# Altium PCB MSXII_DC-DC_Converter.PcbDoc
Units mm, origin at the board's own origin, x right, y up, seen from the top; angles counter-clockwise.
Board outline 120 x 80 mm, 2 copper layers (Top Layer, Bottom Layer); 22 components, 22 nets, 77 pads, 6 vias.
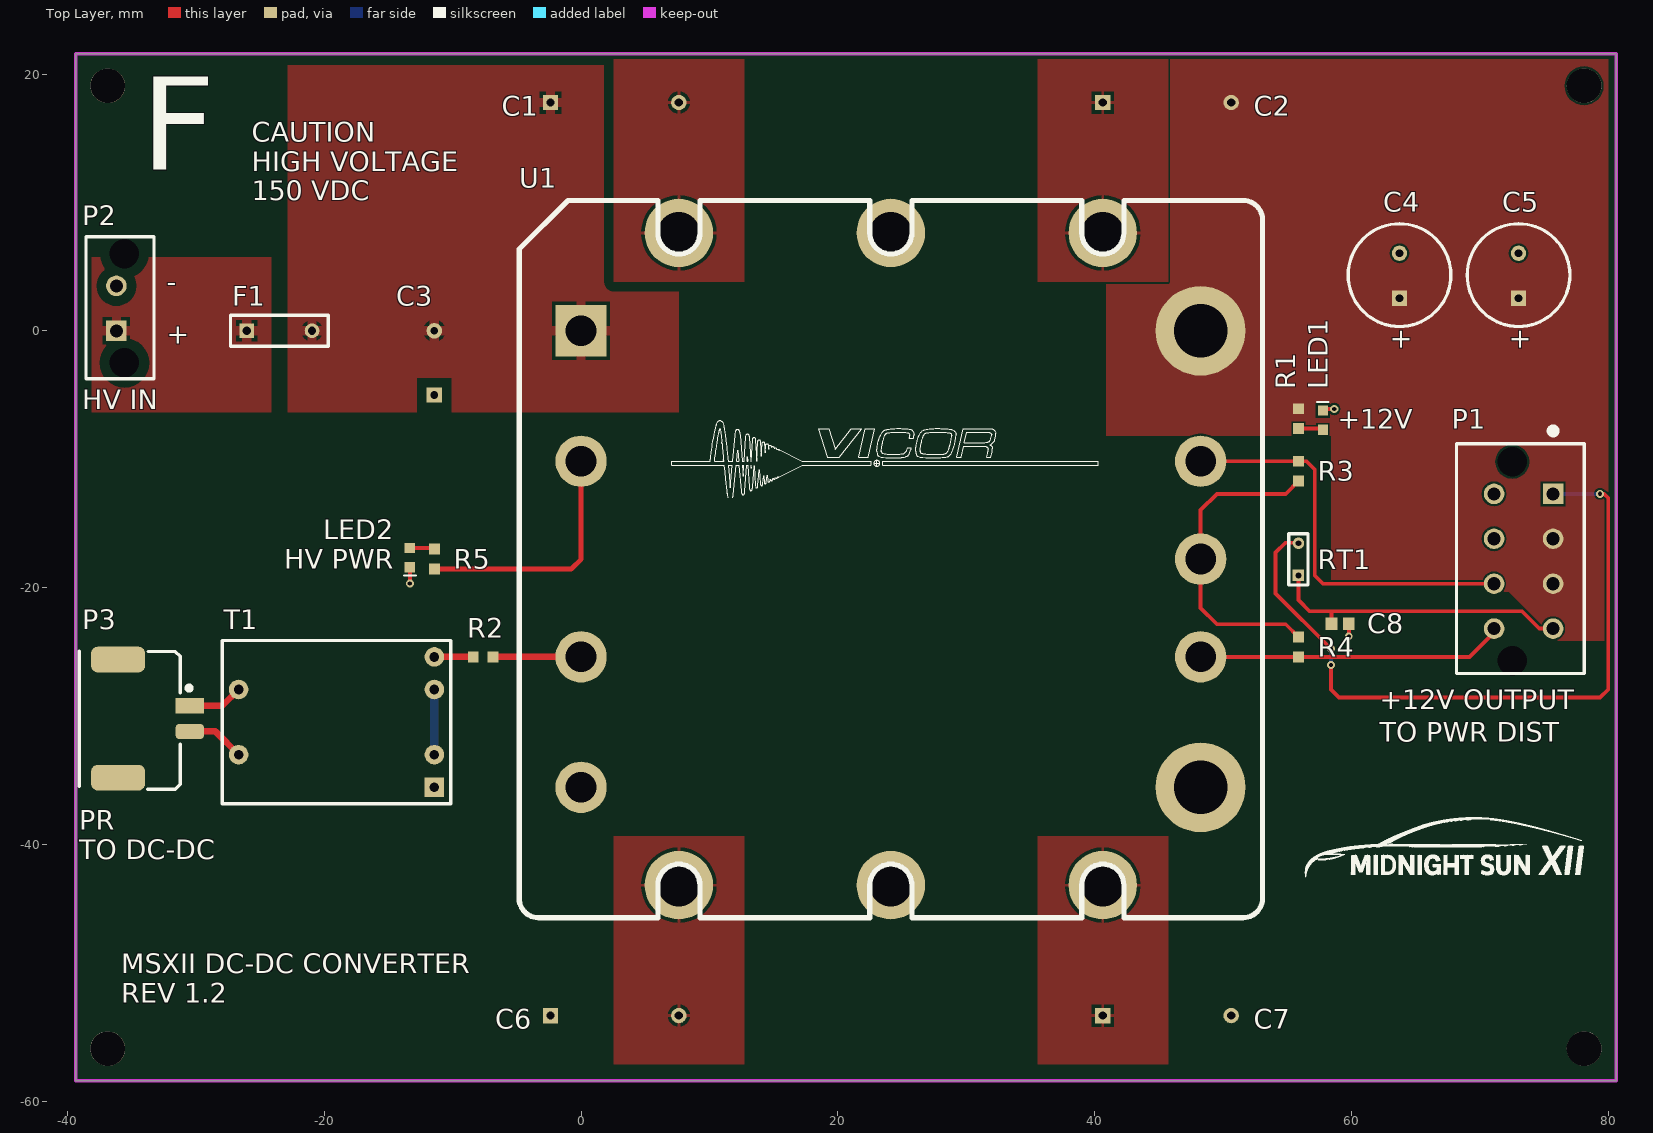
[diagram p0: Top Layer view]
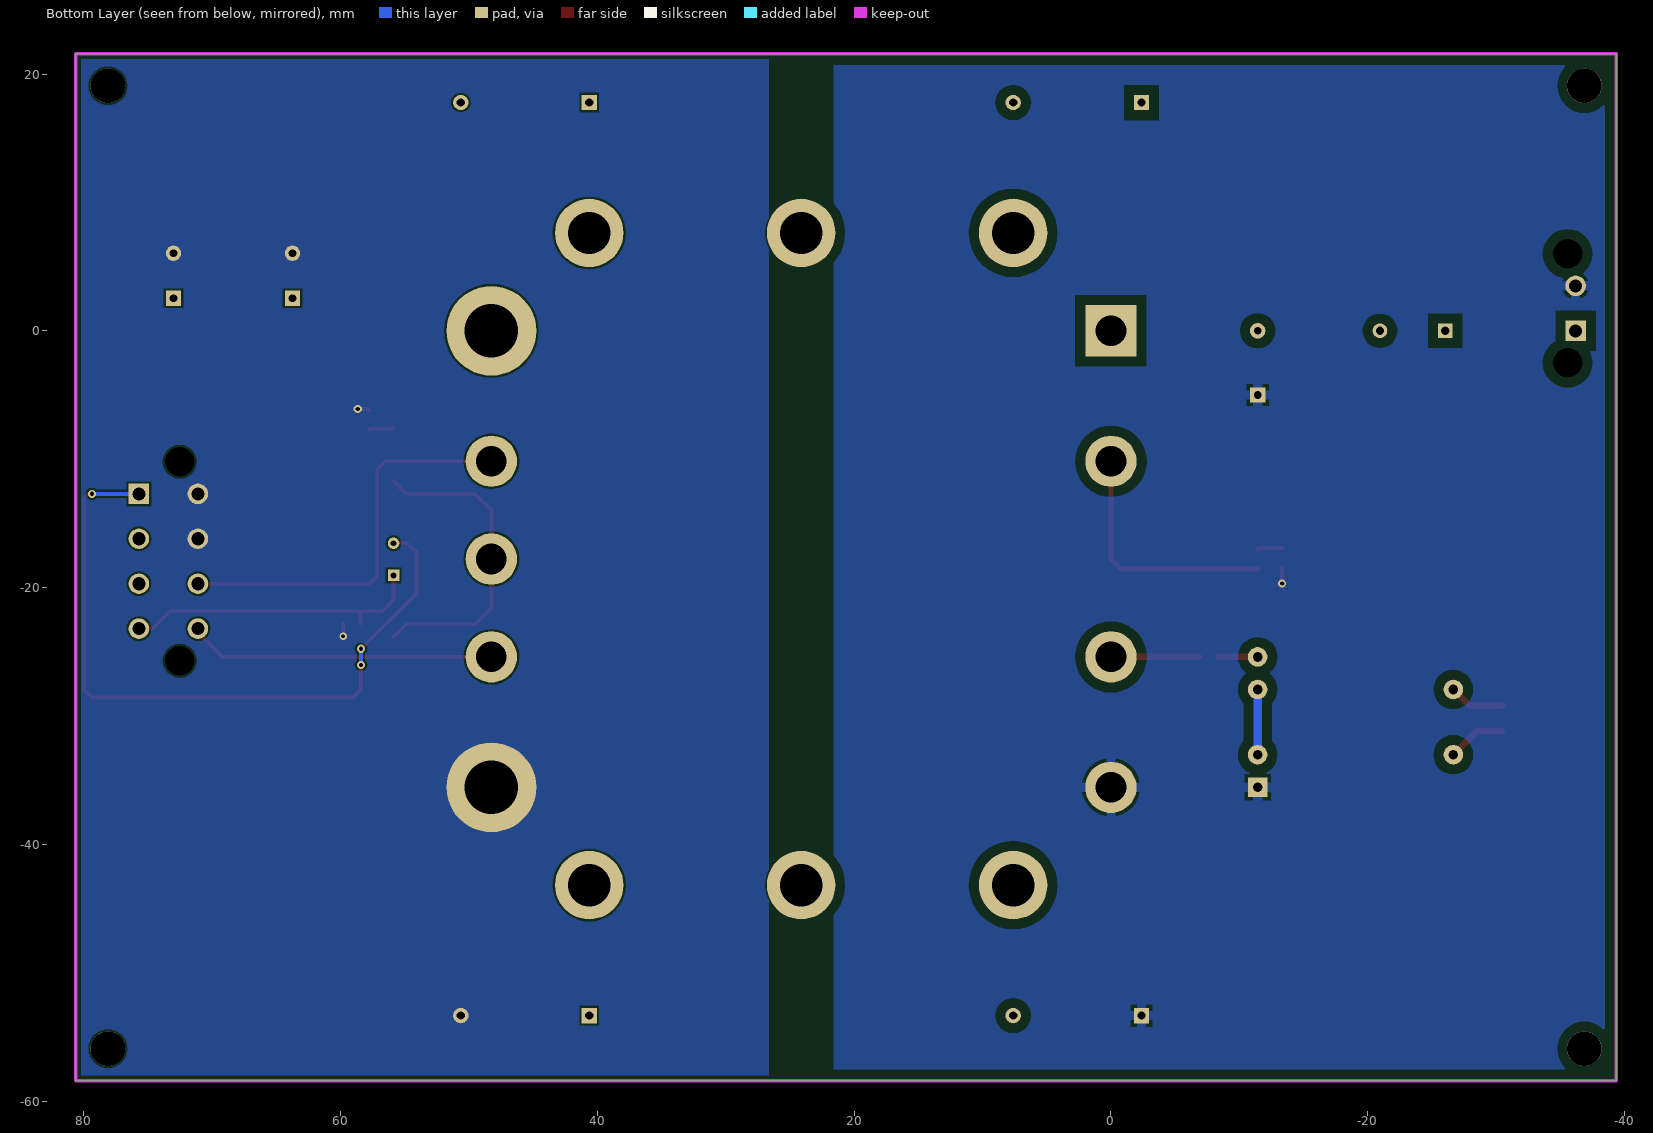
[diagram p1: Bottom Layer view, seen from below]
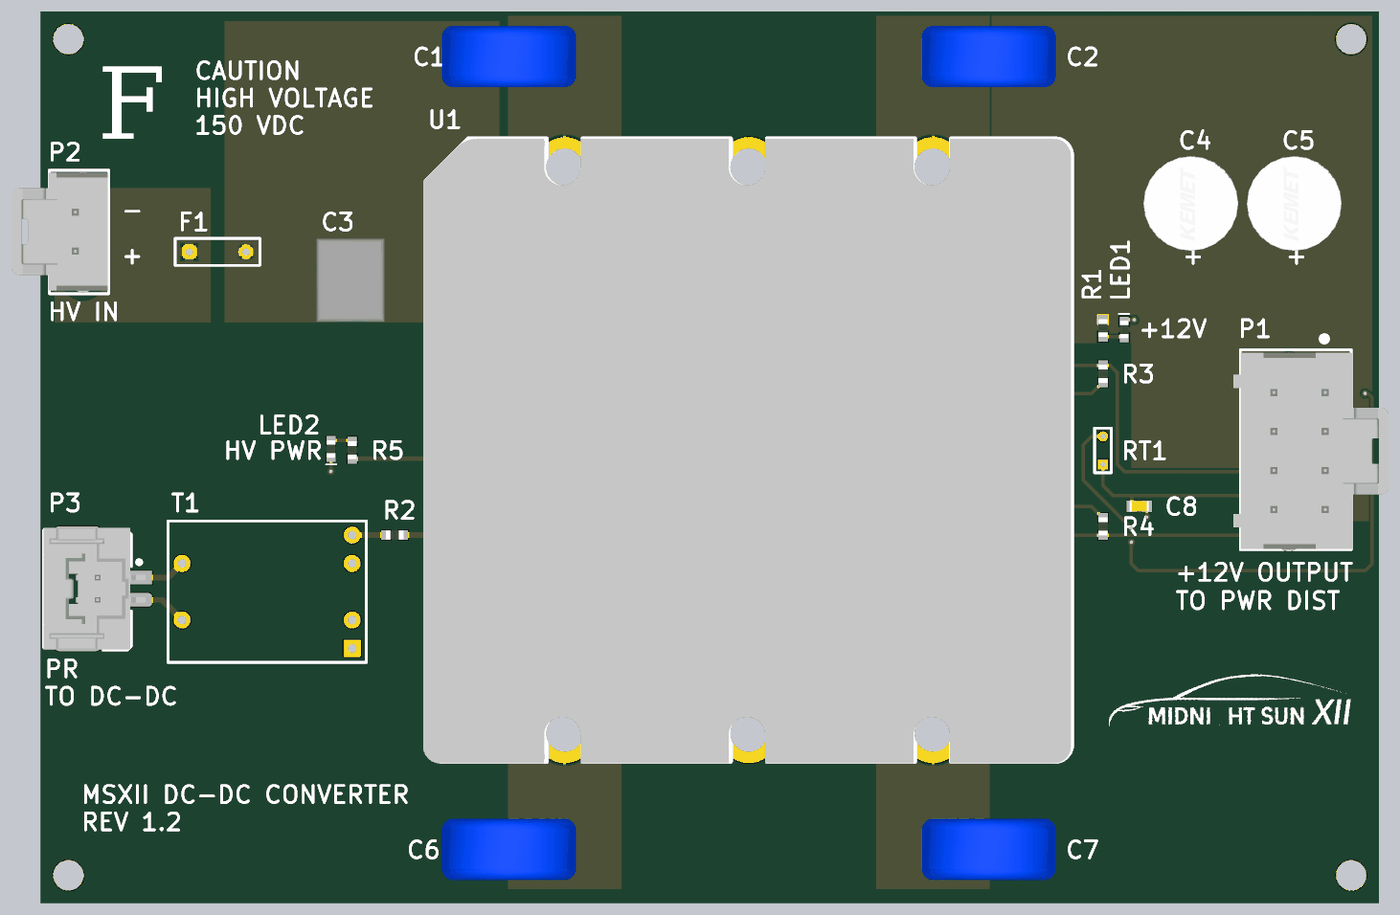
[diagram p2: 3D render of the assembled board from above, using the file's embedded part models]

## Layer stack, top to bottom
Top Solder: solder mask 0.0102, Solder Resist, Dk 3.5
Top Layer: signal copper 0.0356
Dielectric 1: dielectric 0.32, FR-4, Dk 4.8
Bottom Layer: signal copper 0.0356
Bottom Solder: solder mask 0.0102, Solder Resist, Dk 3.5

## Board outline
-39.37,-58.42 80.63,-58.42 80.63,21.58 -39.37,21.58

## Design rules (kind name [scope] priority, off if disabled: settings)
BoardOutlineClearance [All] p1: gap=0.406 ignorepadtopadclearanceinfootprint=FALSE
Clearance "HV Clearance" [InNetClass('HV')] p1: gap=0.762 ignorepadtopadclearanceinfootprint=TRUE
Clearance [All] p2: gap=0.152 ignorepadtopadclearanceinfootprint=FALSE except(0: Arc-Hole Track-Hole SMDPad-Hole THPad-Hole Via-Hole Fill-Hole Poly-Hole Region-Hole Text-Hole)
ComponentClearance ComponentClearance_ControllerBoard [InComponent('P1') vs Identifier = 'Controller-Board'] p1: gap=0 collisioncheckmode=3 verticalgap=0 showdistances=FALSE
ComponentClearance ComponentClearance_Standoffs [Identifier = 'Standoff' vs Identifier = 'Controller-Board'] p2: gap=0 collisioncheckmode=3 verticalgap=0 showdistances=FALSE
ComponentClearance [All] p3: gap=0.254 collisioncheckmode=3 verticalgap=0.254 showdistances=FALSE
DiffPairsRouting [All] p1: maxlimit=0.254 minlimit=0.254 mostfreqgap=0.254 toplayer_minwidth=0.381 toplayer_maxwidth=0.381 toplayer_prefwidth=0.381 bottomlayer_minwidth=0.381 bottomlayer_maxwidth=0.381 bottomlayer_prefwidth=0.381 maxuncoupledlength=12.7
HoleSize [All] p1: absolutevalues=TRUE maxlimit=6.3 minlimit=0.3 maxpercent=80.000 minpercent=20.000
MinimumAnnularRing [All] p1: minimumring=0.152
MinimumSolderMaskSliver [All] p1: minsoldermaskwidth=0.3
PolygonConnect PolygonConnect_5A [InNetClass('5A')] p1: connectstyle=Relief reliefconductorwidth=0.762 reliefentries=4 polygonreliefangle="90 Angle" airgapwidth=0.254
PolygonConnect PolygonConnect_HighCurrent [InNetClass('20A')] p2: connectstyle=Direct reliefconductorwidth=0.254 reliefentries=4 polygonreliefangle="90 Angle" airgapwidth=0.254
PolygonConnect [IsPad] p3: connectstyle=Relief reliefconductorwidth=0.254 reliefentries=4 polygonreliefangle="90 Angle" airgapwidth=0.254
PolygonConnect PolygonConnect_NoThermal [Not(IsPad)] p4: connectstyle=Direct reliefconductorwidth=0.254 reliefentries=4 polygonreliefangle="90 Angle" airgapwidth=0.254
RoutingVias [All] p1: holewidth=0.3 width=0.6 viastyle="Through Hole" minholewidth=0.3 minwidth=0.6 maxholewidth=0.711 maxwidth=1.27
SilkToSolderMaskClearance [IsPad] p1: minsilkscreentomaskgap=0.178 clearancetoexposedcopper=TRUE
SolderMaskExpansion [All] p1: expansion=0.102
Width [All] p1: maxlimit=2.54 minlimit=0.152 preferedwidth=0.381
25 further rules are at their usual default settings.

## Classes and differential pairs
net class 5A: HV_GND NetC1_1 NetF1_1
net class HV: HV_GND NetC1_1 NetF1_1 NetR2_2 NetR5_1
net class 20A: GND NetC2_2
differential pair PR_1: +PR_1_P -PR_1_N

## Components (designator, comment, footprint, x,y, rotation, side; value= is the part's Value field where it differs from the comment)
C1 "CAP CER 4700PF 400VAC Y5V RADIAL" "CAP 4700PF 400VAC Y5V RADIAL" -2.38,17.78 r0 top value=4700pF
C2 "CAP CER 4700PF 400VAC Y5V RADIAL" "CAP 4700PF 400VAC Y5V RADIAL" 40.64,17.78 r0 top value=4700pF
C3 "CAP FILM 0.22UF 5% 250VDC RADIAL" "CAP FILM 0.22UF 5% 250VDC RADIAL" -11.43,-5 r90 top value=0.22uF
C4 "CAP ALUM 100UF 20% 50V RADIAL" "CAP ALUM 100UF 50V" 63.754,2.54 r90 top
C5 "CAP ALUM 100UF 20% 50V RADIAL" "CAP ALUM 100UF 50V" 73.025,2.54 r90 top
C6 "CAP CER 4700PF 400VAC Y5V RADIAL" "CAP 4700PF 400VAC Y5V RADIAL" -2.38,-53.34 r0 top value=4700pF
C7 "CAP CER 4700PF 400VAC Y5V RADIAL" "CAP 4700PF 400VAC Y5V RADIAL" 40.64,-53.34 r0 top value=4700pF
C8 "CAP CER 0.1UF 50V 10% X7R 0603" "CAP, 0603" 59.13,-22.82 r0 top
F1 "5A 400VDC" "FUSE 5A 400VDC RADIAL" -26.035,0 r0 top
LED1 "LED GREEN CLEAR 2V 0603" LED_0603 57.795,-7.652 r90 top
LED2 "LED RED CLEAR 2V 0603" LED_0603 -13.345,-16.973 r270 top
P1 "CONN 8POS ULTRA-FIT 0.138\"" "CONN, 8POS ULTRA-FIT" 75.72,-12.7 r270 top
P2 "CONN 2POS ULTRA-FIT 0.138\"" "CONN, 2POS ULTRA-FIT" -36.195,0 r90 top
P3 "Dura-Clik" "CONN, 2POS Dura-Click Vertical" -30.48,-29.21 r270 top
R1 "RES 4.7K OHM 1% 1/10W 0603" "RES, 0603" 55.88,-6.845 r270 top
R2 "RES 75R OHM 1% 1/10W 0603" "RES, 0603" -7.62,-25.4 r0 top value=75R
R3 "RES 1M OHM 1% 1/10W 0603" "RES, 0603" 55.88,-10.935 r270 top
R4 "RES 1M OHM 1% 1/10W 0603" "RES, 0603" 55.88,-24.625 r270 top
R5 "RES 4.7K OHM 1% 1/10W 0603" "RES, 0603" -11.43,-17.78 r90 top
RT1 "10K NTC" "NTC THERMISTOR BEAD" 55.88,-19.05 r90 top
T1 "PR BUS" "XFMR PR BUS" -11.43,-35.56 r180 top
U1 "12V 250W (No BOM)" "DCDC VICOR 150V-12V 250W" 0,0 r0 top

## Footprints (in the part's own frame and the unit in brackets; to place one, negate y for a bottom-side part, rotate by r counter-clockwise, add the part's x,y. Pads: shape width x height; smd on the part's side, far side on the other; paste and mask are expansions set on the pad)
"CAP 4700PF 400VAC Y5V RADIAL" [mm] "4700pF ±20% 400VAC Ceramic Capacitor Y5V (F) Radial, Disc"
  rect 1.2x1.2 hole 0.65: 1(0,0)
  round 1.2 hole 0.65: 2(10,0)
  body extent -1,-3 11,2.5, height 16
"CAP ALUM 100UF 50V" [mm] "CAP ALUM 100UF 20% 50V RADIAL"
  rect 1.2x1.2 hole 0.6: 1(0,0)
  round 1.2 hole 0.6: 2(3.5,0)
  silkscreen extent -2.2,-4 5.8,4, body extent -2.45,-4.25 6.05,4.25, height 12.5
"CAP FILM 0.22UF 5% 250VDC RADIAL" [mm]
  rect 1.2x1.2 hole 0.6: 1(0,0)
  round 1.2 hole 0.6: 2(5,0)
  body extent -1.3,-2.9 6.2,3.21, height 11.3
"CAP, 0603" [mm] "Chip Capacitor, 2-Leads, Body 1.60x0.81mm, IPC Medium Density"
  rect 0.9x1 smd mask+0.076: 1(-0.675,0) 2(0.675,0)
  body extent -0.87,-0.48 0.87,0.48, height 0.9
"CONN, 2POS Dura-Click Vertical" [mm] "WM7169CT-ND"
  rect 1.2x2.2 smd: 1(0,0)
  rrect50% 1.2x2.2 smd: 2(2,0)
  rrect50% 2x4.2 smd: 3(-3.6,-5.58) 3(5.6,-5.58)
  silkscreen extent -4.28,-8.6 6.5,0.05, body extent -4.45,-8.63 6.45,0.52, height 8
"CONN, 2POS ULTRA-FIT" [mm] "2 Positions Header, Shrouded Connector 0.138\" (3.50mm) Through Hole Gold"
  rect 1.6x1.6 hole 1.02: 1(0,0)
  round 1.6 hole 1.02: 2(3.5,0)
  round 1.6 hole 2.3: ""(-2.5,-0.63) ""(6,-0.63)
  silkscreen extent -3.74,-2.93 7.33,2.37, body extent -3.48,-2.87 7.12,5.79, height 13.85
"CONN, 8POS ULTRA-FIT" [mm]
  rect 1.6x1.6 hole 1.02: 1(0,0)
  round 1.6 hole 1.02: 2(3.5,0) 3(7,0) 4(10.5,0) 5(0,-4.6) 6(3.5,-4.6) 7(7,-4.6) 8(10.5,-4.6)
  round 0 hole 2.3: ""(-2.5,-3.18) ""(13,-3.18)
  silkscreen extent -5.1,-7.53 14,2.42, body extent -3.64,-8.14 13.96,5.77, height 13.9
"DCDC VICOR 150V-12V 250W" [mm]
  rect 4x4 hole 2.39: 1(0,0)
  round 4 hole 2.39: 2(0,-10.16) 3(0,-25.4) 4(0,-35.56) 6(48.26,-25.4) 7(48.26,-17.78) 8(48.26,-10.16)
  round 7 hole 4.16: 5(48.26,-35.56) 9(48.26,0)
  round 5.334 hole 3.302: 10(7.62,7.62) 11(40.64,7.62) 12(7.62,-43.18) 13(40.64,-43.18) 14(24.13,-43.18) 14(24.13,7.62)
  silkscreen extent -4.83,-45.72 53.09,10.16, body extent -5.08,-45.89 53.01,10.16, height 11.44
"FUSE 5A 400VDC RADIAL" [mil]
  rect 45x45 hole 25: 1(0,0)
  round 45 hole 25: 2(200,0)
  silkscreen extent -50,-48 250,48, body extent -55,-52 255,52, height 320
LED_0603 [mm]
  rect 0.8x0.8 smd: 1(-0.05,0.01) 2(1.45,0.01)
  silkscreen extent 2.09,-0.43 2.09,0.48, body extent -0.1,-0.39 1.5,0.41, height 0.55
"NTC THERMISTOR BEAD" [mm] "NTC Thermistor 10k Bead"
  rect 0.9x0.9 hole 0.45: 1(0,0)
  round 0.9 hole 0.45: 2(2.5,0)
  silkscreen extent -0.75,-0.75 3.25,0.75
"RES, 0603" [mm] "Chip Resistor, 2-Leads, Body 1.60x0.80mm, IPC Medium Density"
  rect 0.85x0.85 smd: 1(-0.775,0) 2(0.775,0)
  body extent -0.8,-0.4 0.8,0.4, height 0.55
"XFMR PR BUS" [mil]
  rect 60x60 hole 30: 1(0,0)
  round 60 hole 30: 2(0,-100) 3(0,-300) 4(0,-400) 5(600,-100) 6(600,-300)
  silkscreen extent -50,-450 650,50, body extent -34,-434 634,34, height 260

## Part data
C1 C2 C6 C7: "4700pF ±20% 400VAC Ceramic Capacitor Y5V (F) Radial, Disc", Manufacturer=KEMET, Manufacturer Part Number=C951U472MVVDBA7317, Operating Temperature="-40°C ~ 125°C", Package / Case="Radial, Disc", Ratings="X1, Y1", Supplier Part Number 1=399-9517-1-ND, Temperature Coefficient="Y5V (F)", Tolerance=±20%, Voltage - Rated=400VAC, Applications=Safety, Category=Capacitors, ComponentLink1Description=https://search.kemet.com/component-edge/download/datasheet/C951U472MVVDBA7317.pdf, ComponentLink1URL=https://search.kemet.com/component-edge/download/datasheet/C951U472MVVDBA7317.pdf, Failure Rate=-, Features=-, Height - Seated (Max)=-, Lead Spacing="0.394\" (10.00mm)", Lead Style="Formed Leads - Kinked", Mounting Type="Through Hole", Packaging="Cut Tape (CT)", Part Status=Active, Pricing 1="1=1.12, 10=0.795, 100=0.5234, 500=0.38772 (CAD)", RoHS="RoHS Compliant", Size / Dimension="0.472\" Dia (12.00mm)", Stock 1=9713, Supplier 1=Digi-Key, Thickness (Max)=-
C3: "0.22µF Film Capacitor 140V 250V Polyester, Polyethylene Terephthalate (PET), Metallized - Stacked Radial", Dielectric Material="Polyester, Polyethylene Terephthalate (PET), Metallized - Stacked", Manufacturer=KEMET, Manufacturer Part Number=R82IC3220AA60J, Operating Temperature="-55°C ~ 105°C", Package / Case=Radial, Ratings=AEC-Q200, Supplier Part Number 1=399-6046-ND, Tolerance=±5%, Voltage Rating - AC=140V, Voltage Rating - DC=250V, Applications=Automotive, Category=Capacitors, ComponentLink1Description=https://search.kemet.com/component-edge/download/datasheet/R82IC3220AA60J.pdf, ComponentLink1URL=https://search.kemet.com/component-edge/download/datasheet/R82IC3220AA60J.pdf, Features=-, Height - Seated (Max)="0.437\" (11.10mm)", Lead Spacing="0.197\" (5.00mm)", Mounting Type="Through Hole", Packaging=Bulk, Part Status=Active, Pricing 1="1=0.82, 10=0.581, 100=0.382, 500=0.28302, 1000=0.24056, 2500=0.22641, 5000=0.21226 (CAD)", RoHS="RoHS Compliant", Size / Dimension="0.283\" L x 0.236\" W (7.20mm x 6.00mm)", Stock 1=6730, Supplier 1=Digi-Key, Termination="PC Pins"
C4 C5: "100µF 50V Aluminum Capacitors Radial, Can 74 mOhm @ 100kHz 3000 Hrs @ 105°C", Capacitance=100µF, ESR (Equivalent Series Resistance)="74 mOhm @ 100kHz", Lifetime @ Temp.="3000 Hrs @ 105°C", Manufacturer 1=KEMET, Manufacturer Part Number 1=ESY107M050AG3AA, Operating Temperature="-40°C ~ 105°C", Package / Case="Radial, Can", Ripple Current - High Frequency="730mA @ 100kHz", Ripple Current - Low Frequency="511mA @ 120Hz", Supplier Part Number 1=399-6119-ND, Tolerance=±20%, Voltage Rating=50V, Applications="General Purpose", Category=Capacitors, ComponentLink1Description=http://capacitoredge.kemet.com/capedge2/DataSheet?pn=ESY107M050AG3AA, ComponentLink1URL=http://capacitoredge.kemet.com/capedge2/DataSheet?pn=ESY107M050AG3AA, Description 1="CAP ALUM 100UF 20% 50V RADIAL", Height - Seated (Max)="0.492\" (12.50mm)", Impedance="74 mOhm", Lead Spacing="0.138\" (3.50mm)", Mounting Type="Through Hole", Packaging=Bulk, Part Status=Active, Polarization=Polar, Pricing 1="1=0.5, 10=0.345, 100=0.2074, 500=0.15558, 1000=0.13138, 2500=0.12446, 5000=0.11755 (CAD)", RoHS="RoHS Compliant", Size / Dimension="0.315\" Dia (8.00mm)", Stock 1=7068, Supplier 1=Digi-Key, Surface Mount Land Size=-
C8: "0.10µF ±10% 50V Ceramic Capacitor X7R 0603 (1608 Metric)", Capacitance=0.1µF, Manufacturer 1="AVX Corporation", Manufacturer Part Number 1=06035C104KAT2A, Operating Temperature="-55°C ~ 125°C", Package / Case="0603 (1608 Metric)", Ratings=-, Supplier Part Number 1=478-5052-1-ND, Temperature Coefficient=X7R, Tolerance=±10%, Voltage=50V, ComponentLink1Description=http://datasheets.avx.com/X7RDielectric.pdf, ComponentLink1URL=http://datasheets.avx.com/X7RDielectric.pdf, Height - Seated (Max)=-, Lead Spacing=-, Lead Style=-, Mounting Type="Surface Mount, MLCC", Packaging="Cut Tape (CT)", Part Status=Active, Size / Dimension="0.063\" L x 0.032\" W (1.60mm x 0.81mm)", Supplier 1=Digi-Key, Thickness (Max)="0.035\" (0.90mm)"
F1: library part "FUSE 5A 125VAC/400VDC RADIAL", "FUSE BOARD MNT 5A 125VAC/400VDC", Breaking Capacity @ Rated Voltage="10kA AC, 4.2kA DC", Color=-, Manufacturer=Eaton, Manufacturer Part Number=BK/PCE-5-R, Package / Case="Radial, Box", Supplier Part Number 1=283-2770-ND, Approvals="CSA, UL", Category="Circuit Protection", ComponentLink1Description=http://www.cooperindustries.com/content/dam/public/bussmann/Electronics/Resources/product-datasheets/Bus_Elx_DS_2034_PC_Tron_Series.pdf, ComponentLink1URL=http://www.cooperindustries.com/content/dam/public/bussmann/Electronics/Resources/product-datasheets/Bus_Elx_DS_2034_PC_Tron_Series.pdf, Fuse Type="Board Mount (Cartridge Style Excluded)", Mounting Type="Through Hole", Operating Temperature=-, Packaging=Bulk, Part Status=Active, Pricing 1="1=3.06, 5=2.91, 10=2.765, 50=2.2306, 100=1.8911, 250=1.8426, 500=1.55166, 1000=1.38196, 5000=1.21224 (CAD)", Response Time=Fast, RoHS="RoHS Compliant", Size / Dimension="0.300\" L x 0.095\" W x 0.170\" H (7.62mm x 2.41mm x 4.32mm)", Stock 1=0, Supplier 1=Digi-Key
LED1: "Green 572nm LED Indication - Discrete 2V 0603 (1608 Metric)", Color=Green, Current - Test=20mA, Lens Color=Colorless, Manufacturer="Wurth Electronics Inc.", Manufacturer Part Number=150060VS75000, Millicandela Rating=40mcd, Package / Case="0603 (1608 Metric)", Supplier Device Package=0603, Supplier Part Number 1=732-4980-1-ND, Voltage - Forward (Vf) (Typ)=2V, Category=Optoelectronics, ComponentLink1Description=http://katalog.we-online.de/led/datasheet/150060VS75000.pdf, ComponentLink1URL=http://katalog.we-online.de/led/datasheet/150060VS75000.pdf, Features=-, Height (Max)=0.80mm, Lens Style/Size="Rectangle with Flat Top, 1.10mm x 0.70mm", Lens Transparency=Clear, Mounting Type="Surface Mount", Packaging="Cut Tape (CT)", Part Status=Active, Pricing 1="1=0.21, 100=0.1617, 500=0.13964 (CAD)", RoHS="RoHS Compliant", Size / Dimension="1.60mm L x 0.80mm W", Stock 1=9408, Supplier 1=Digi-Key, Viewing Angle=140°, Wavelength - Dominant=570nm, Wavelength - Peak=572nm
LED2: "Red 631nm LED Indication - Discrete 2V 0603 (1608 Metric)", Color=Red, Current - Test=20mA, Lens Color=Colorless, Manufacturer="Wurth Electronics Inc.", Manufacturer Part Number=150060RS75000, Millicandela Rating=250mcd, Package / Case="0603 (1608 Metric)", Supplier Device Package=0603, Supplier Part Number 1=732-4978-1-ND, Voltage - Forward (Vf) (Typ)=2V, Category=Optoelectronics, ComponentLink1Description=http://katalog.we-online.de/led/datasheet/150060RS75000.pdf, ComponentLink1URL=http://katalog.we-online.de/led/datasheet/150060RS75000.pdf, Features=-, Height (Max)=0.80mm, Lens Style/Size="Rectangle with Flat Top, 1.10mm x 0.70mm", Lens Transparency=Clear, Mounting Type="Surface Mount", Packaging="Cut Tape (CT)", Part Status=Active, Pricing 1="1=0.21, 100=0.1617, 500=0.13964 (CAD)", RoHS="RoHS Compliant", Size / Dimension="1.60mm L x 0.80mm W", Stock 1=35521, Supplier 1=Digi-Key, Viewing Angle=140°, Wavelength - Dominant=625nm, Wavelength - Peak=630nm
P1: "8 Positions Header Connector 0.138\" (3.50mm) Through Hole Tin", Current Rating=-, Insulation Color=Black, Manufacturer="Molex, LLC", Manufacturer Part Number=1722991108, Material Flammability Rating="UL94 V-0", Operating Temperature="-40°C ~ 105°C", Supplier Part Number 1=WM11779-ND, Voltage Rating=400V, Applications="Automotive, General Purpose, Industrial, Lighting, Medical, Military, Telecommunications", Category="Connectors, Interconnects", ComponentLink1Description=http://www.molex.com/pdm_docs/sd/1722991108_sd.pdf, ComponentLink1URL=http://www.molex.com/pdm_docs/sd/1722991108_sd.pdf, Connector Type=Header, Contact Finish - Mating=Tin, Contact Finish - Post=Tin, Contact Finish Thickness - Mating="60µin (1.52µm)", Contact Finish Thickness - Post="60µin (1.52µm)", Contact Length - Mating=-, Contact Length - Post="0.126\" (3.20mm)", Contact Material="Copper Alloy", Contact Shape=Square, Contact Type="Male Pin", Fastening Type="Latch Holder", Features="Board Guide, Solder Retention", Ingress Protection=-, Insulation Height="0.465\" (11.80mm)", Insulation Material="Liquid Crystal Polymer (LCP)", Mated Stacking Heights=26.99mm, Mounting Type="Through Hole", Number of Positions=8, Number of Positions Loaded=All, Number of Rows=2, Overall Contact Length=-, Packaging=Tray, Part Status=Active, Pitch - Mating="0.138\" (3.50mm)", Pricing 1="1=2.12, 10=1.923, 50=1.7262, 100=1.6478, 250=1.49084, 500=1.37314, 1000=1.17697, 2500=1.0985, 5000=1.04358 (CAD)", RoHS="RoHS Compliant", Row Spacing - Mating="0.181\" (4.60mm)", Shrouding="Shrouded - 4 Wall", Stock 1=60, Style="Board to Cable/Wire", Supplier 1=Digi-Key, Termination=Solder
P2: "2 Positions Header, Shrouded Connector 0.138\" (3.50mm) Through Hole Gold", Current Rating=-, Insulation Color=Black, Manufacturer 1="Molex, LLC", Manufacturer Part Number 1=1722861302, Material Flammability Rating="UL94 V-0", Operating Temperature="-40°C ~ 120°C", Supplier Part Number 1=WM11673-ND, Voltage=400V, ComponentLink1Description=http://www.molex.com/pdm_docs/sd/1722861302_sd.pdf, ComponentLink1URL=http://www.molex.com/pdm_docs/sd/1722861302_sd.pdf, Connector Type=Header, Contact Finish - Mating=Gold, Contact Finish - Post=Tin, Contact Finish Thickness - Mating="30µin (0.76µm)", Contact Finish Thickness - Post="60µin (1.52µm)", Contact Length - Mating=-, Contact Length - Post="0.126\" (3.20mm)", Contact Material="Copper Alloy", Contact Shape=Square, Contact Type="Male Pin", Fastening Type="Latch Holder", Ingress Protection=-, Insulation Height="0.465\" (11.80mm)", Insulation Material="Liquid Crystal Polymer (LCP)", Mated Stacking Heights=26.99mm, Mounting Type="Through Hole", Number of Positions=2, Number of Positions Loaded=All, Number of Rows=1, Overall Contact Length=-, Packaging=Tray, Part Status=Active, Pitch - Mating="0.138\" (3.50mm)", Row Spacing - Mating=-, Series=UltraFit, Shrouding="Shrouded - 4 Wall", Style="Board to Board or Cable", Supplier 1=Digi-Key, Termination="Kinked Pin, Solder"
P3: library part "CONN 2POS DURA-CLIK 0.079\" VERT", "2 Positions Header, Shrouded Connector 0.079\" (2.00mm) Surface Mount, Vertical Tin", Current Rating=-, Insulation Color=Natural, Manufacturer="Molex, LLC", Manufacturer Part Number=5600200220, Supplier Part Number 1=WM10862CT-ND, Applications="Automotive, Industrial", Category="Connectors, Interconnects", ComponentLink1Description=http://www.molex.com/pdm_docs/sd/5600200220_sd.pdf, ComponentLink1URL=http://www.molex.com/pdm_docs/sd/5600200220_sd.pdf, Connector Type=Header, Contact Finish - Mating=Tin, Contact Finish - Post=Tin, Contact Finish Thickness - Mating=-, Contact Finish Thickness - Post=-, Contact Length - Mating=-, Contact Length - Post=-, Contact Material="Copper Alloy", Contact Shape=Square, Contact Type="Male Pin", Fastening Type="Latch Lock", Features="Solder Retention", Ingress Protection=-, Insulation Height="0.315\" (8.00mm)", Insulation Material="Polyamide (PA), Nylon", Mated Stacking Heights=9.3mm, Material Flammability Rating=-, Mounting Type="Surface Mount", Number of Positions=2, Number of Positions Loaded=All, Number of Rows=1, Operating Temperature=-, Overall Contact Length=-, Packaging="Cut Tape (CT)", Part Status=Active, Pitch - Mating="0.079\" (2.00mm)", Pricing 1="1=1.16, 10=1.012, 25=0.952, 50=0.9122, 100=0.8727, 250=0.79336 (CAD)", RoHS="RoHS Compliant", Row Spacing - Mating=-, Shrouding="Shrouded - 4 Wall", Stock 1=11912, Style="Board to Cable/Wire", Supplier 1=Digi-Key, Termination=Solder, Voltage Rating=-
R1 R5: "4.7k Ohm ±1% 0.1W, 1/10W Chip Resistor 0603 (1608 Metric) Moisture Resistant Thick Film", Manufacturer 1=Yageo, Manufacturer Part Number 1=RC0603FR-074K7L, Operating Temperature="-55°C ~ 155°C", Package / Case="0603 (1608 Metric)", Power (Watts)=1/10W, Resistance (Ohms)=4.7k, Supplier Device Package=0603, Supplier Part Number 1=311-4.70KHRCT-ND, Temperature Coefficient=±100ppm/°C, Tolerance=±1%, Category=Resistors, ComponentLink1Description=http://www.yageo.com/documents/recent/PYu-RC_Group_51_RoHS_L_7.pdf, ComponentLink1URL=http://www.yageo.com/documents/recent/PYu-RC_Group_51_RoHS_L_7.pdf, Composition="Thick Film", Description 1="RES SMD 4.7K OHM 1% 1/10W 0603", Failure Rate=-, Features="Moisture Resistant", Height - Seated (Max)="0.022\" (0.55mm)", Packaging="Cut Tape (CT)", Part Status=Active, Pricing 1="1=0.16, 10=0.022, 100=0.0089, 1000=0.00402, 2500=0.00349 (CAD)", RoHS="RoHS Compliant", Size / Dimension="0.063\" L x 0.031\" W (1.60mm x 0.80mm)", Stock 1=3487566, Supplier 1=Digi-Key
R2: "75 Ohms ±1% 0.1W, 1/10W Chip Resistor 0603 (1608 Metric) Automotive AEC-Q200, Moisture Resistant Thick Film", Manufacturer=Yageo, Manufacturer Part Number=AC0603FR-0775RL, Operating Temperature="-55°C ~ 155°C", Package / Case="0603 (1608 Metric)", Power (Watts)="0.1W, 1/10W", Supplier Device Package=0603, Supplier Part Number 1=YAG3630CT-ND, Temperature Coefficient=±100ppm/°C, Tolerance=±1%, Category=Resistors, ComponentLink1Description=http://www.yageo.com/NewPortal/yageodocoutput?fileName=/pdf/R-Chip/PYu-AC_51_RoHS_L_6.pdf, ComponentLink1URL=http://www.yageo.com/NewPortal/yageodocoutput?fileName=/pdf/R-Chip/PYu-AC_51_RoHS_L_6.pdf, Composition="Thick Film", Failure Rate=-, Features="Automotive AEC-Q200, Moisture Resistant", Height - Seated (Max)="0.022\" (0.55mm)", Packaging="Cut Tape (CT)", Part Status=Active, Pricing 1="1=0.15, 10=0.036, 100=0.0145, 1000=0.00652, 2500=0.00566 (CAD)", RoHS="RoHS Compliant", Size / Dimension="0.063\" L x 0.032\" W (1.60mm x 0.80mm)", Stock 1=20391, Supplier 1=Digi-Key
R3 R4: "1M Ohm ±1% 0.1W, 1/10W Chip Resistor 0603 (1608 Metric) Moisture Resistant Thick Film", Manufacturer 1=Yageo, Manufacturer Part Number 1=RC0603FR-071ML, Operating Temperature="-55°C ~ 155°C", Package / Case="0603 (1608 Metric)", Power (Watts)=1/10W, Resistance (Ohms)=1M, Supplier Device Package=0603, Supplier Part Number 1=311-1.00MHRCT-ND, Temperature Coefficient=±100ppm/°C, Tolerance=±1%, Category=Resistors, ComponentLink1Description=http://www.yageo.com/documents/recent/PYu-RC_Group_51_RoHS_L_7.pdf, ComponentLink1URL=http://www.yageo.com/documents/recent/PYu-RC_Group_51_RoHS_L_7.pdf, Composition="Thick Film", Description 1="RES SMD 1M OHM 1% 1/10W 0603", Failure Rate=-, Features="Moisture Resistant", Height - Seated (Max)="0.022\" (0.55mm)", Packaging="Cut Tape (CT)", Part Status=Active, Pricing 1="1=0.16, 10=0.022, 100=0.0089, 1000=0.00402, 2500=0.00349 (CAD)", RoHS="RoHS Compliant", Size / Dimension="0.063\" L x 0.031\" W (1.60mm x 0.80mm)", Stock 1=2336711, Supplier 1=Digi-Key
RT1: library part "NTC THERMISTOR 10K 1% BEAD", "NTC Thermistor 10k Bead", B Value Tolerance=±1%, Manufacturer="Murata Electronics North America", Manufacturer Part Number=NXRT15XH103FA1B030, Operating Temperature="-40°C ~ 125°C", Package / Case=Bead, Resistance in Ohms @ 25°C=10k, Supplier Part Number 1=490-8601-ND, B0/50=-, B25/50=3380K, B25/75=-, B25/85=3434K, B25/100=3455K, Category="Sensors, Transducers", ComponentLink1Description=https://www.murata.com/~/media/webrenewal/support/library/catalog/products/thermistor/ntc/r44e.ashx, ComponentLink1URL=https://www.murata.com/~/media/webrenewal/support/library/catalog/products/thermistor/ntc/r44e.ashx, Length - Lead Wire=-, Mounting Type="Through Hole", Packaging=Bulk, Part Status=Active, Pricing 1="1=0.96, 5=0.91, 10=0.792, 25=0.696, 50=0.5784, 100=0.4925, 500=0.42834, 1000=0.3748, 5000=0.33197 (CAD)", Resistance Tolerance=±1%, RoHS="RoHS Compliant", Stock 1=25017, Supplier 1=Digi-Key
T1: library part "XFMR PR BUS", "Transformer for PR bus on Vicor DC-DC", Manufacturer="Vicor Corporation", Manufacturer Part Number=29768, Supplier Part Number 1=1102-1587-ND, Accessory Type=Transformer, Category="Power Supplies - Board Mount", ComponentLink1Description=http://asp.vicorpower.com/CADPDF/899N5I.PDF, ComponentLink1URL=http://asp.vicorpower.com/CADPDF/899N5I.PDF, For Use With/Related Products="VICOR Maxi, Mini, Micro-Sized Modules", Part Status=Active, Pricing 1="1=15.2, 10=13.82, 25=12.7844, 100=11.7476, 250=10.711, 500=10.01996, 1000=9.19073 (CAD)", RoHS="RoHS Compliant", Stock 1=2198, Supplier 1=Digi-Key
U1: library part "DCDC VICOR 150V-12V 250W", "Isolated Module DC DC Converter 1 Output 12V 20.83A 100V - 200V Input", Current - Output (Max)=20.83A, Manufacturer="Vicor Corporation", Manufacturer Part Number=V150B12C250BL, Operating Temperature="-20°C ~ 100°C", Package / Case="9-DIP Module", Supplier Part Number 1=1102-1234-ND, Voltage - Input (Max)=200V, Voltage - Input (Min)=100V, Voltage - Isolation="3kV (3000V)", Voltage - Output 1=12V, Voltage - Output 2=-, Applications="ITE (Commercial)", Category="Power Supplies - Board Mount", ComponentLink1Description=http://cdn.vicorpower.com/documents/datasheets/ds_150vin-mini-family.pdf, ComponentLink1URL=http://cdn.vicorpower.com/documents/datasheets/ds_150vin-mini-family.pdf, Efficiency=88.1%, Features="OVP, UVLO", Mounting Type="Through Hole", Number of Outputs=1, Packaging=Bulk, Part Status=Active, Pricing 1="1=252.65 (CAD)", RoHS="RoHS non-compliant", Size / Dimension="2.28\" L x 2.20\" W x 0.50\" H (57.9mm x 55.9mm x 12.7mm)", Stock 1=0, Supplier 1=Digi-Key, Type="Isolated Module", Voltage - Output 3=-

## Free pads (board coordinates)
  round 2.7 hole 2.7: ""(-36.87,-55.92) ""(-36.87,19.08) ""(78.13,-55.92) ""(78.13,19.08)

## Via types
v1: diameter 0.635, hole 0.33, Top Layer to Bottom Layer, tented both sides, 5 vias
v2: diameter 0.6, hole 0.3, Top Layer to Bottom Layer, tented both sides, 1 vias

## Nets (pads, with @x,y where several pads share a name; then routed paths per layer and width w, separated by ;. In a path a pad name is that pad's centre, name@x,y a point inside that pad or via, vN(x,y) a via of type N, cw(c..) or ccw(c..) an arc to the next point about the centre after c; other vN are vias at no path point)
DCDC_TEMP_1: P1.1 RT1.2 | length 56
  Top Layer w0.305: RT1.2@55.88,-16.51 54.864,-16.51 54.102,-17.272 54.102,-20.447 v1(58.42,-24.765) ; v1(58.42,-26.035) 58.42,-27.94 59.055,-28.575 79.375,-28.575 80.01,-27.94 80.01,-13.036 79.674,-12.7 v1(79.375,-12.7)
  Bottom Layer w0.305: v1(58.42,-26.035) v1(58.42,-24.765) ; P1.1 v1(79.375,-12.7)
GND: C4.2 C5.2 C7.2 C8.2 LED1.2 P1.5 P1.6 U1.5 | length 1.9
  Top Layer w0.305: LED1.2 57.891,-6.096 v1(58.674,-6.096) ; v2(59.805,-23.795) C8.2
HV_GND: C3.1 C6.1 LED2.2 P2.2 T1.1 U1.4 | length 1.3
  Top Layer w0.305: v1(-13.335,-19.685) LED2.2
LDO_3V: C8.1 P1.4 RT1.1 | length 23.7
  Top Layer w0.305: RT1.1 55.88,-20.97 56.754,-21.844 58.53,-21.844 ; C8.1 58.455,-21.919 58.53,-21.844 ; P1.4 74.635,-23.2 73.279,-21.844 58.53,-21.844
NetC1_1: C1.1 C3.2 F1.2 U1.1
NetC1_2: C1.2 U1.10
NetC2_1: C2.1 U1.11
NetC2_2: C2.2 C4.1 C5.1 P1.2 P1.3 R1.1 U1.9
NetC6_2: C6.2 U1.12
NetC7_1: C7.1 U1.13
NetF1_1: F1.1 P2.1
NetLED1_1: LED1.1 R1.2 | length 1.9
  Top Layer w0.305: R1.2 57.703,-7.62 LED1.1
NetLED2_1: LED2.1 R5.2 | length 1.9
  Top Layer w0.305: LED2.1 -11.512,-16.923 R5.2
NetR2_1: R2.1 T1.4 | length 3
  Top Layer w0.508: T1.4 R2.1
NetR2_2: R2.2 U1.3 | length 6.8
  Top Layer w0.508: R2.2 U1.3
NetR5_1: R5.1 U1.2 | length 19.4
  Top Layer w0.381: R5.1 -0.775,-18.555 0,-17.78 U1.2
NetT1_2: T1.2 T1.3 | length 5.1
  Bottom Layer w0.635: T1.2 T1.3
PR_1_N: P3.2 T1.5 | length 4.6
  Top Layer w0.508: P3.2 -28.48,-31.21 T1.5
PR_1_P: P3.1 T1.6 | length 4.3
  Top Layer w0.508: P3.1 -27.94,-29.21 T1.6
S+_1: P1.7 R3.1 U1.8 | length 31.6
  Top Layer w0.305: U1.8 R3.1 56.515,-10.16 57.15,-10.795 57.15,-19.05 57.8,-19.7 P1.7
S-_1: P1.8 R4.2 U1.6 | length 23.9
  Top Layer w0.305: U1.6 R4.2 69.215,-25.4 71.12,-23.495 P1.8
SC_1: R3.2 R4.1 U1.7 | length 24.7
  Top Layer w0.305: R4.1 54.89,-22.86 49.53,-22.86 48.26,-21.59 U1.7 48.26,-13.97 49.53,-12.7 54.89,-12.7 R3.2
pads on no net: P1. P2. P3.3 U1.14

## Polygon pours and split planes (outlines as drawn)
NetC6_2 on Top Layer "NETC6_2_L01_P024" (solid, pour order 24): 2.54,-39.37 12.7,-39.37 12.7,-57.15 2.54,-57.15
NetC7_1 on Top Layer "NETC7_1_L01_P023" (solid, pour order 23): 35.56,-39.37 45.72,-39.37 45.72,-57.15 35.56,-57.15
NetC1_2 on Top Layer "NETC1_2_L01_P022" (solid, pour order 22): 2.54,3.81 12.7,3.81 12.7,21.59 2.54,21.59
NetC2_1 on Top Layer "NETC2_1_L01_P025" (solid, pour order 25): 35.56,3.81 45.72,3.81 45.72,22.86 35.56,22.86
NetC2_2 on Top Layer "NETC2_2_L01_P027" (solid, remove dead copper, pour order 27): 40.894,-8.162 58.42,-8.162 58.42,-24.13 80.01,-24.13 80.01,21.58 40.894,21.58
NetF1_1 on Top Layer "NETF1_1_L01_P021" (solid, pour order 21): -38.1,5.715 -24.13,5.715 -24.13,-6.35 -38.1,-6.35
NetC1_1 on Top Layer "NETC1_1_L01_P026" (solid, pour order 26): -22.86,21.58 -22.86,-6.35 7.62,-6.35 7.62,21.58
HV_GND on Bottom Layer "HV_GND_L02_P029" (solid, pour order 29): -39.37,-58.42 21.59,-58.42 21.59,22.86 -39.37,22.86
GND on Bottom Layer "GND_L02_P028" (solid, pour order 28): 26.67,-58.42 26.67,22.86 82.55,22.86 82.55,-58.42

## Keep-outs
Keep-Out Layer:
  lines w0.254: -39.37,-58.42 -39.37,21.59 80.645,21.59 80.645,-58.42 -39.37,-58.42

## Other copper
Top Layer:
  pour cut-out: 57.785,-20.32 72.25,-20.32 75.425,-23.495 57.785,-23.495

## Silkscreen, mask and mechanical layers (free items; w line width, h text height)
Top Overlay:
  drawing of 19 lines, arcs and shapes, not listed
  text "F" at -34.29,10.16 h12.7
  text "CAUTION / HIGH VOLTAGE / 150 VDC" at -25.654,10.16 h1.52
  text "-" at -32.258,3.048 h1.52
  text "+" at -32.258,-1.016 h1.52
  text "HV IN" at -38.843,-6.096 h1.52
  text "+12V" at 58.928,-7.62 h1.52
  text "HV PWR" at -23.114,-18.542 h1.52
  text "+12V OUTPUT" at 62.23,-29.464 h1.52
  text "TO PWR DIST" at 62.23,-32.004 h1.52
  text "PR / TO DC-DC" at -39.097,-41.158 h1.52
  text "MSXII DC-DC CONVERTER / REV 1.2" at -35.814,-52.324 h1.52

## Text inside footprints (layer, text, board x,y; h text height)
C4: Top Overlay "+" at 64.554,-1.56 h1.52 r90
C5: Top Overlay "+" at 73.825,-1.56 h1.52 r90